# Altium PCB PCB1.PcbDoc
Units mil, origin at the board's own origin, x right, y up, seen from the top; angles counter-clockwise.
Board outline 2175 x 1060 mil, 2 copper layers (Top Layer, Bottom Layer); 53 components, 53 nets, 224 pads, 91 vias.
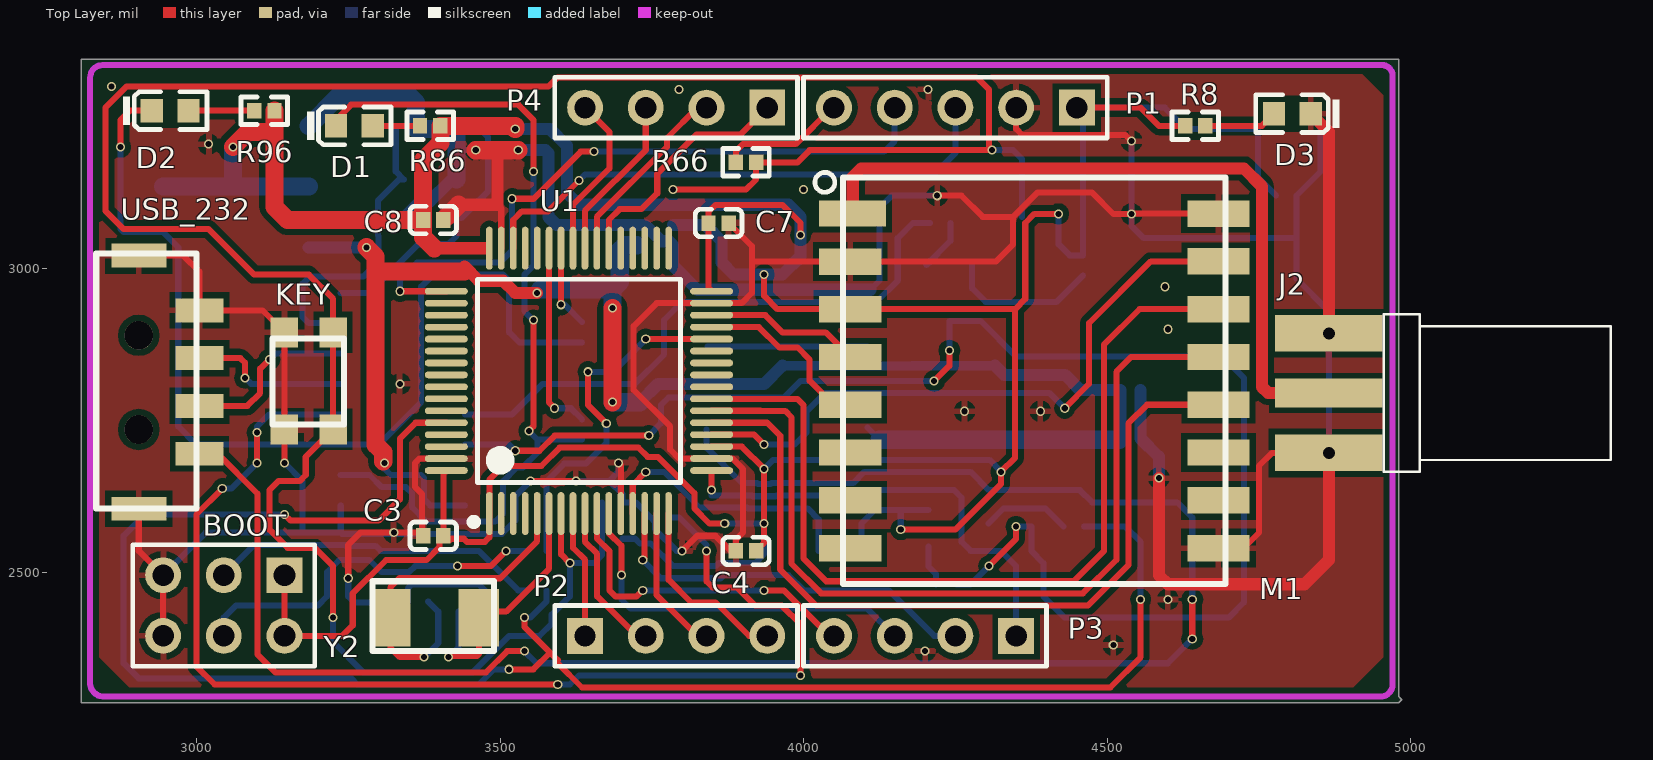
[diagram p0: Top Layer view]
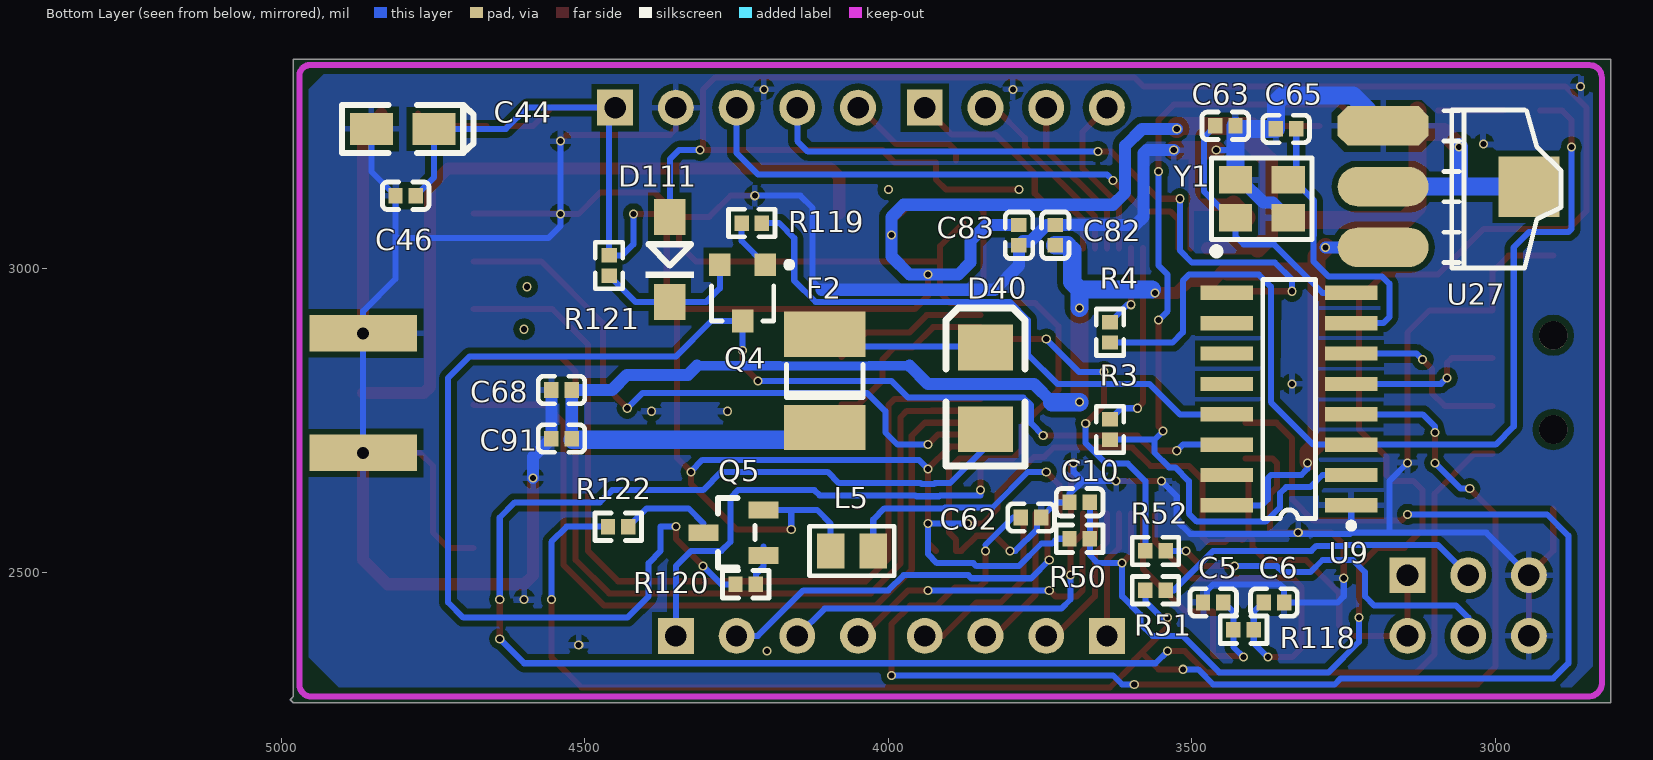
[diagram p1: Bottom Layer view, seen from below]
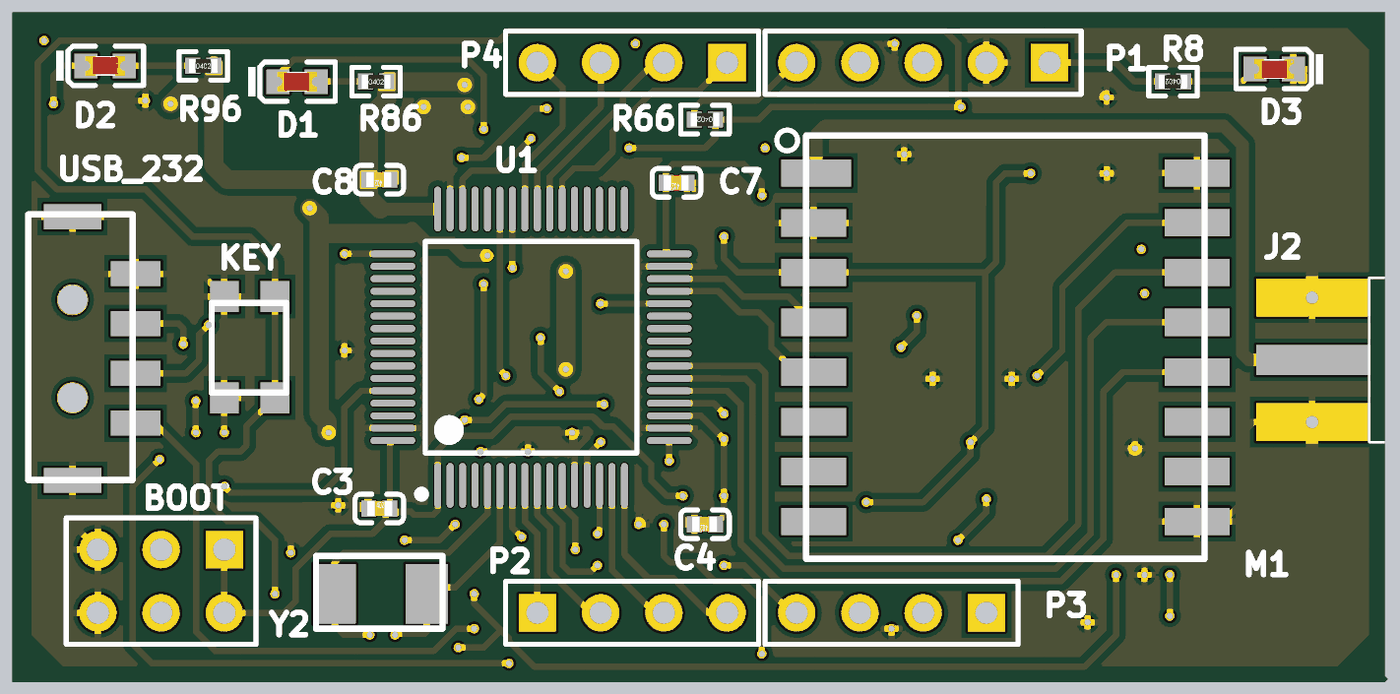
[diagram p2: 3D render of the assembled board from above, using the file's embedded part models]
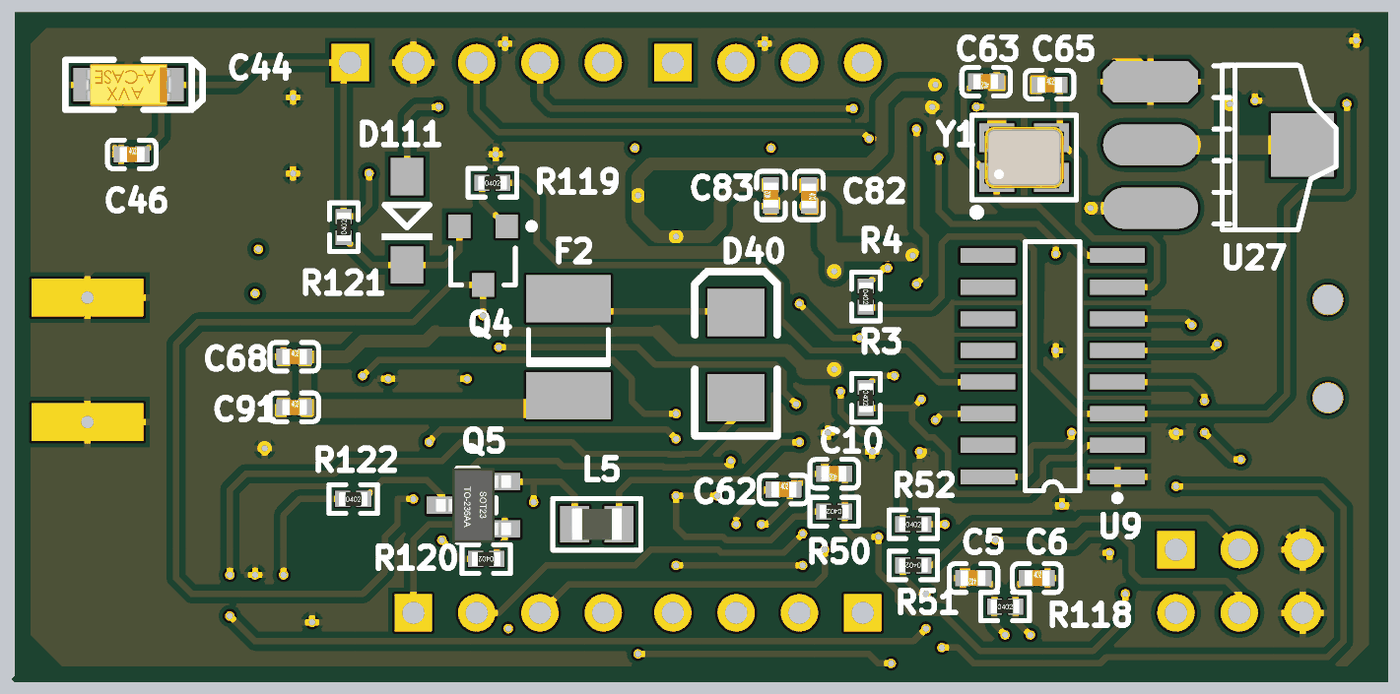
[diagram p3: 3D render of the assembled board from below, using the file's embedded part models]

## Layer stack, top to bottom
Top Layer: signal copper 1.4
Dielectric: dielectric 12.6, FR-4, Dk 4.8
Bottom Layer: signal copper 1.4

## Board outline
2810,3345 2810,2285 4980,2285 4985,2290 4980,2295 4980,3345 2810,3345

## Design rules (kind name [scope] priority, off if disabled: settings)
Clearance [All] p1: gap=10
MinimumSolderMaskSliver [All] p1: minsoldermaskwidth=3
PolygonConnect [All] p1: connectstyle=Relief reliefconductorwidth=10 reliefentries=4 polygonreliefangle="90 Angle"
RoutingVias [All] p1: holewidth=28 width=50 viastyle="Through Hole" minholewidth=28 minwidth=50 maxholewidth=28 maxwidth=50
SilkToSilkClearance [All] p1: silktosilkclearance=0
SilkscreenOverComponentPads [All] p1: minsilkscreentomaskgap=0
SolderMaskExpansion [All] p1: expansion=4
Width [All] p1: maxlimit=30 minlimit=10 preferedwidth=10
25 further rules are at their usual default settings.

## Components (designator, comment, footprint, x,y, rotation, side; value= is the part's Value field where it differs from the comment)
BOOT "Header 3X2" HDR2X3 3145,2495 r180 top
C3 "100nF (104) 10% 16V" 0402_C 3390,2560 r0 top
C4 "100nF (104) 10% 16V" 0402_C 3905,2535 r180 top
C5 "22pF (220) 5% 50V" 0402_C 3465,2450 r0 bottom
C6 "22pF (220) 5% 50V" 0402_C 3365,2450 r180 bottom
C7 "100nF (104) 10% 16V" 0402_C 3860,3075 r180 top
C8 "100nF (104) 10% 16V" 0402_C 3390,3080 r180 top
C10 "100nF (104) 10% 16V" 0402_C 3685,2615 r0 bottom
C44 "10uF (106) ±10% 16V" CASE-A_3216 4800,3230 r180 bottom
C46 "100nF (104) 10% 16V" 0402_C 4795,3120 r180 bottom
C62 "100nF (104) 10% 16V" 0402_C 3765,2590 r180 bottom
C63 "22pF (220) 5% 50V" 0402_C 3445,3235 r0 bottom
C65 "22pF (220) 5% 50V" 0402_C 3345,3230 r180 bottom
C68 "100nF (104) 10% 16V" 0402_C 4538.27,2800 r180 bottom
C82 "100nF (104) 10% 16V" 0402_C 3725,3055 r270 bottom
C83 "100nF (104) 10% 16V" 0402_C 3785,3055 r90 bottom
C91 "100nF (104) 10% 16V" 0402_C 4538.27,2720 r180 bottom
D1 "红灯 0603" 0603_LED_S1 3260,3235 r0 top
D2 "红灯 0603" 0603_LED_S1 2956.73,3260 r0 top
D3 "红灯 0603" 0603_LED_S1 4805,3255 r180 top
D40 "1N5819" LED-3528 3840,2735 r90 bottom
D111 "1N4148" DIODE_SOP 4360,3085 r270 bottom
F2 "500ma/30V" 1812 4105,2815 r90 bottom
J2 "SMA" SMA-2 4865,2795 r180 top
KEY "PWR_KEY" PCBComponent_1#1 3125,2885 r270 top
L5 "10uH" 0805_L 4060,2535 r180 bottom
M1 "Ra-01" "Ra-01 Module" 4380,2815 r0 top
P1 "Header 5" HDR1X5 4450,3265 r180 top
P2 "Header 4" HDR1X4 3640,2395 r0 top
P3 "Header 4" HDR1X4 4350,2395 r180 top
P4 "Header 4" HDR1X4 3940,3265 r180 top
Q4 "S8050" SOT-23R 4240,2965 r0 bottom
Q5 "SS8550 Y2" SOT-23(SOT-23-3) 4255,2565 r180 bottom
R3 "22Ω (22R0) ±1%" 0402_R 3635,2735 r270 bottom
R4 "22Ω (22R0) ±1%" 0402_R 3635,2895 r270 bottom
R8 "1KΩ (1001) ±1%" 0402_R 4645,3235 r180 top
R50 "10KΩ (1002) ±1%" 0402_R 3685,2555 r0 bottom
R51 "10KΩ (1002) ±1%" 0402_R 3560,2470 r0 bottom
R52 "10KΩ (1002) ±1%" 0402_R 3560,2535 r180 bottom
R66 "100Ω (1000) ±1%" 0402_R 3905,3175 r180 top
R86 "1KΩ (1001) ±1%" 0402_R 3385,3235 r0 top
R96 "1KΩ (1001) ±1%" 0402_R 3111.73,3260 r0 top
R118 "1MΩ (1004) ±1%" 0402_R 3415,2405 r180 bottom
R119 "1KΩ (1001) ±1%" 0402_R 4225,3075 r180 bottom
R120 "1KΩ (1001) ±1%" 0402_R 4235,2480 r0 bottom
R121 "10KΩ (1002) ±1%" 0402_R 4460,3005 r90 bottom
R122 "1KΩ (1001) ±1%" 0402_R 4445,2575 r180 bottom
U1 "STM32F103RCT6" LQFP-64_10x10x05P 3630,2815 r0 top
U9 "CH340G" SOP16M 3340,2785 r90 bottom
U27 "AMS1117-3.3" AMS1117 3185,3235 r270 bottom
USB_232 "USB" PCBComponent_1#2 3005,2655 r90 top
Y1 "12MHz" LC-SMD-3225_4P 3385,3115 r180 bottom
Y2 "8MHz" PCBComponent_1#3 3465,2425 r180 top

## Footprints (in the part's own frame and the unit in brackets; to place one, negate y for a bottom-side part, rotate by r counter-clockwise, add the part's x,y. Pads: shape width x height; smd on the part's side, far side on the other; paste and mask are expansions set on the pad)
0402_C [mm]
  rect 0.6x0.65 smd mask+0.051: 1(-0.425,0) 2(0.425,0)
  silkscreen extent -0.97,-0.58 0.97,0.58, body extent -0.48,-0.3 0.52,0.3, height 0.2
0402_R [mm]
  rect 0.6x0.65 smd mask+0.051: 1(-0.425,0) 2(0.425,0)
  silkscreen extent -0.97,-0.58 0.97,0.58, body extent -0.57,-0.27 0.58,0.28, height 0.41
0603_LED_S1 [mm]
  rect 0.93x0.98 smd: A(0.77,0) K(-0.77,0)
  silkscreen extent -1.97,-0.79 1.54,0.79, body extent -0.8,-0.4 0.8,0.4, height 0.6
0805_L [mm]
  rect 1.16x1.47 smd: 1(-0.89,0) 2(0.89,0)
  silkscreen extent -1.77,-1.04 1.77,1.03, body extent -1,-0.64 1,0.64, height 0.6
1812 [mm] "Chip Capacitor; Body 4.5 x 3.2 mm (LxW typ)"
  rect 1.9x3.4 smd: 1(-1.95,0) 2(1.95,0)
  silkscreen extent -0.7,-1.6 0.7,1.6
AMS1117 [mil]
  oct 65x150 smd: 1(0.03,-0.06)
  oval 65x150 smd: 2(100.03,-0.06) 3(200.03,-0.06)
  rect 100x100 smd: 4(100.03,239.94)
  silkscreen extent -26,100 234,293
CASE-A_3216 [mm]
  rect 1.8x1.35 smd: 1(1.31,0) 2(-1.31,0)
  silkscreen extent -2.54,-1 2.97,1, body extent -1.7,-0.84 1.7,0.84, height 1.71
DIODE_SOP [mm]
  rect 1.5x1.3 smd: 1(0,0) 2(3.556,0)
  silkscreen extent 1.14,-1.02 2.56,1.02
HDR1X4 [mm]
  rect 1.5x1.5 hole 0.889: 1(0,0)
  round 1.5 hole 0.889: 2(2.54,0) 3(5.08,0) 4(7.62,0)
  silkscreen extent -1.27,-1.27 8.89,1.27
HDR1X5 [mm] "Connector; Header; 5 Position"
  rect 1.5x1.5 hole 0.9: 1(0,0)
  round 1.5 hole 0.9: 2(2.54,0) 3(5.08,0) 4(7.62,0) 5(10.16,0)
  silkscreen extent -1.27,-1.27 11.43,1.27
HDR2X3 [mm]
  rect 1.5x1.5 hole 0.9: 1(0,0)
  round 1.5 hole 0.9: 2(0,2.54) 3(2.54,0) 4(2.54,2.54) 5(5.08,0) 6(5.08,2.54)
  silkscreen extent -1.27,-1.27 6.35,3.81
LC-SMD-3225_4P [mm]
  rect 1.4x1.15 smd: 1(-1.1,-0.8) 2(1.1,-0.8) 3(1.1,0.8) 4(-1.1,0.8)
  silkscreen extent -2.1,-2.35 2.1,1.7, body extent -1.6,-1.25 1.6,1.25, height 0.61
LED-3528 [mil]
  rect 75x90 smd: 1(-0.02,0.13) 2(134.98,0.13)
  silkscreen extent -60,-65 200,65
LQFP-64_10x10x05P [mm]
  oval 0.28x1.8 smd mask+0.051: 1(-3.75,-5.55) 2(-3.25,-5.55) 3(-2.75,-5.55) 4(-2.25,-5.55) 5(-1.75,-5.55) 6(-1.25,-5.55) 7(-0.75,-5.55) 8(-0.25,-5.55) 9(0.25,-5.55) 10(0.75,-5.55) 11(1.25,-5.55) 12(1.75,-5.55) 13(2.25,-5.55) 14(2.75,-5.55) 15(3.25,-5.55) 16(3.75,-5.55) 33(3.75,5.55) 34(3.25,5.55) 35(2.75,5.55) 36(2.25,5.55) 37(1.75,5.55) 38(1.25,5.55) 39(0.75,5.55) 40(0.25,5.55) 41(-0.25,5.55) 42(-0.75,5.55) 43(-1.25,5.55) 44(-1.75,5.55) 45(-2.25,5.55) 46(-2.75,5.55) 47(-3.25,5.55) 48(-3.75,5.55)
  oval 1.8x0.28 smd mask+0.051: 17(5.55,-3.75) 18(5.55,-3.25) 19(5.55,-2.75) 20(5.55,-2.25) 21(5.55,-1.75) 22(5.55,-1.25) 23(5.55,-0.75) 24(5.55,-0.25) 25(5.55,0.25) 26(5.55,0.75) 27(5.55,1.25) 28(5.55,1.75) 29(5.55,2.25) 30(5.55,2.75) 31(5.55,3.25) 32(5.55,3.75) 49(-5.55,3.75) 50(-5.55,3.25) 51(-5.55,2.75) 52(-5.55,2.25) 53(-5.55,1.75) 54(-5.55,1.25) 55(-5.55,0.75) 56(-5.55,0.25) 57(-5.55,-0.25) 58(-5.55,-0.75) 59(-5.55,-1.25) 60(-5.55,-1.75) 61(-5.55,-2.25) 62(-5.55,-2.75) 63(-5.55,-3.25) 64(-5.55,-3.75)
  silkscreen extent -4.55,-6.05 4.25,4.25
PCBComponent_1#1 [mm]
  rect 1.25x1.15 smd: 1(-0.254,2.54) 2(-0.254,0.508) 3(3.81,2.54) 4(3.81,0.508)
  silkscreen extent 0,0 3.6,3
PCBComponent_1#2 [mm]
  rect 1x2 smd: 1(1.016,0) 2(3.016,0) 3(5.016,0) 5(7.016,0)
  rect 1x2.3 smd: 9(-1.284,2.54) 10(9.308,2.54)
  round 1.2 hole 1.2: 11(2.032,2.54) 12(5.969,2.54)
  silkscreen extent -1.27,0.13 9.4,4.32
PCBComponent_1#3 [mm]
  rect 1.7x2.4 smd: 1(0,0) 2(3.7,0)
  silkscreen extent -0.64,-1.52 4.44,1.4
"Ra-01 Module" [mm]
  rect 2.8x1.1 smd: 1(-7.6,7.002)
  rect 2.6x1.1 smd: 2(-7.7,4.99) 3(-7.7,3.002) 4(-7.7,1.002) 5(-7.7,-0.998) 6(-7.7,-2.998) 7(-7.7,-4.998) 8(-7.7,-6.998) 9(7.7,-6.998) 10(7.7,-4.998) 11(7.7,-2.998) 12(7.7,-0.998) 13(7.7,1.002) 14(7.7,3.002) 15(7.7,5.002) 16(7.7,6.996)
  silkscreen extent -9.18,-8.5 8,8.72
SMA-2 [mm]
  rect 4.5x1.2 smd: 1(0,0)
  rect 4.5x1.524 hole 0.5: 2(0,2.5) 2(0,-2.5)
  silkscreen extent -11.8,-3.3 -2.3,3.3
SOP16M [mm]
  rect 0.6x2.2 smd: 1(-4.445,-2.6) 2(-3.175,-2.6) 3(-1.905,-2.6) 4(-0.635,-2.6) 5(0.635,-2.6) 6(1.905,-2.6) 7(3.175,-2.6) 8(4.445,-2.6) 9(4.445,2.6) 10(3.175,2.6) 11(1.905,2.6) 12(0.635,2.6) 13(-0.635,2.6) 14(-1.905,2.6) 15(-3.175,2.6) 16(-4.445,2.6)
  silkscreen extent -5.42,-2.72 5,1.1
SOT-23(SOT-23-3) [mm]
  rect 1.25x0.7 smd: 1(1.25,-0.95) 2(1.25,0.95) 3(-1.25,0)
  silkscreen extent -0.65,-1.46 0.9,1.46, body extent -1.5,-1.5 1.5,1.5, height 1.3
SOT-23R [mm]
  rect 0.9x0.95 smd: 1(0.95,-1.048) 2(-0.95,-1.048) 3(0,1.302)
  silkscreen extent -2.07,-1.17 1.3,1.3

## Part data
BOOT: "Header, 3-Pin, Dual row"
C3 C4 C7 C8 C10 C46 C62 C68 C82 C83 C91: library part "0402 100nF (104) 10% 16V", "贴片电容"
C5 C6 C63 C65: library part "0402 22pF (220) 5% 50V", "贴片电容"
C44: library part "3216 10uF (106) 10% 16V", "钽电容"
D1 D2 D3: library part "0603 红灯", "发光二极管"
D40: library part "Diode 1N4001", "1 Amp General Purpose Rectifier"
D111: library part D
F2: library part FUSE2, "Fuse"
J2: library part SMA-2, "SMA-2"
KEY: library part KEY_M
L5: library part INDUCTOR1
M1: library part "Ra-01 Module"
P1: "Header, 5-Pin"
P2 P3 P4: "Header, 4-Pin"
Q4: library part QNPN, "NPN Bipolar Transistor"
Q5: library part "SOT-23 SS8550 Y2", "三极管"
R3 R4: library part "0402 22Ω (22R0) 1%", "贴片电阻"
R8 R86 R96 R119 R120 R122: library part "0402 1KΩ (1001) 1%", "贴片电阻"
R50 R51 R52 R121: library part "0402 10KΩ (1002) 1%", "贴片电阻"
R66: library part "0402 100Ω (1000) 1%", "贴片电阻"
R118: library part "0402 1MΩ (1004) 1%", "贴片电阻"
U1: library part STM32F103RDT6
U9: "USB2UART"
U27: library part AMS1117
USB_232: library part USB5
Y1: library part Component_1
Y2: library part XTAL, "Crystal Oscillator"

## Via types
v1: diameter 15, hole 10, Top Layer to Bottom Layer, 91 vias

## Nets (pads, with @x,y where several pads share a name; then routed paths per layer and width w, separated by ;. In a path a pad name is that pad's centre, name@x,y a point inside that pad or via, vN(x,y) a via of type N, cw(c..) or ccw(c..) an arc to the next point about the centre after c; other vN are vias at no path point)
3.3V: BOOT.1 BOOT.2 C3.2 C4.1 C7.2 C8.2 C44.1 C46.2 C83.2 L5.1 M1.3 P1.1 Q5.2 R8.2 R50.2 R86.2 R96.2 R121.2 U1.1 U1.19 U1.32 U1.48 U1.64 U27.2 U27.4 | length 7054.8
  Top Layer w10: BOOT.1@3165,2475 BOOT.1 BOOT.2 3240,2395 3257.41,2412.41 3257.41,2465 3312.41,2520 3379.09,2520 3400.08,2540.99 3400.08,2553.35 C3.2 ; U1.64@3411.5,2666.54 3406.73,2661.77 3406.73,2563.27 3417.32,2552.68 3419.64,2555 3440.36,2555 3445.36,2550 3475,2550 3482.36,2557.36 U1.1 3482.36,2652.4 3505,2675.04 3514.61,2675.04 3514.64,2675 3568.28,2675 3598.28,2705 3728.06,2705 3743.06,2690 3760,2690 3820,2630 3820,2605 3845,2580 v1(3870,2580) ; U1.19 3898.27,2706.73 v1(3935,2670) v1(3935,2580) 3935,2548.27 C4.1 ; U1.32@3848.5,2963.46 3843.27,2968.7 C7.2 3843.27,3093.27 3855,3105 3965,3105 3995,3075 v1(3995,3055) ; v1(3935,2990) 3935,2955 3956.8,2933.2 M1.3 4348.2,2933.2 ; v1(4160,2570) 4250,2570 4325,2645 v1(4325,2665) 4348.2,2688.2 4348.2,2933.2 ; v1(4420,3090) 4380,3090 4365,3075 4365,2950 4348.2,2933.2 ; P1.1 4555,3265 4585,3235 R8.2
  Top Layer w20: 3391.5,3033.5 3475,3033.5
  Top Layer w30: v1(3060,3200) 3085,3225 3128.46,3225 ; R96.2 3128.46,3225 ; 3391.5,3033.5 3373.27,3051.73 C8.2 ; v1@3520,3235 R86.2 3401.73,3206.73 3373.27,3178.27 C8.2 ; v1(3525,3230) v1@3525,3235 ; 3128.46,3225 3128.46,3101.54 3150,3080 C8.2
  Bottom Layer w10: R50.2 3722.45,2555 3730.24,2547.2 3747.8,2547.2 3785,2510 3855,2510 3860,2515 3920,2515 3935,2530 v1(3935,2580) v1(3870,2580) ; v1(3935,2670) 3950,2685 4306.18,2685 v1@4325,2666.18 ; L5.1 4095.04,2580 4117.44,2602.4 Q5.2 ; v1(4160,2570) 4160,2600 ; v1(4420,3090) 4420,3040 4438.27,3021.73 R121.2 P1.1@4460,3255 ; P1.1 4595,3265 4630,3230 C44.1 4748.43,3149.84 C46.2
  Bottom Layer w20: v1(3525,3230) 3582.43,3230 3610,3202.43 3610,3125 3630,3105 3975,3105 3995,3085 v1(3995,3055) 3995,3020 3965,2990 v1(3935,2990) 3885,2990 3865,3010 3865,3045 3838.27,3071.73 C83.2
  Bottom Layer w30: U27.4 3060,3134.97 ; v1(3060,3200) 3060,3134.97 ; U27.2 3060,3134.97
BOOT0: R51.2 R122.1 U1.60 | length 3073.7
  Top Layer w10: v1(3145,2595) 3155,2585 3300,2585 3335,2620 3335,2720 3361.1,2746.1 U1.60 ; v1(3515,2340) 3555,2340 3582.3,2367.3 ; v1(3540,2425) 3540,2410 3595,2355 ; 3595,2350 3635,2310 4505,2310 4555,2360 v1(4555,2455)
  Bottom Layer w10: v1(3145,2595) 2915,2595 2880,2560 2880,2350 2905,2325 3255,2325 3265,2315 3465,2315 3490,2340 v1(3515,2340) ; v1(3540,2425) 3550,2425 3576.73,2451.73 R51.2 ; R122.1 4530,2575 4555,2550 v1(4555,2455)
BOOT1: R52.1 U1.28 | length 594.9
  Top Layer w10: v1(3645,2830) 3645,2775 v1(3675,2745) ; v1(3740,2883.9) U1.28
  Bottom Layer w10: R52.1 3576.73,2650 3605.46,2678.72 3641.28,2678.72 3675,2712.45 v1(3675,2745) ; v1(3645,2830) 3686.1,2830 v1(3740,2883.9)
CE: M1.4 U1.30 | length 256.8
  Top Layer w10: U1.30 3936.73,2923.27 3965,2895 4036.31,2895 M1.4
"CH340 D+": U9.5 USB_232.3 | length 264.9
  Top Layer w10: USB_232.3 3072.48,2852.48 3080,2844.96 v1(3080,2820)
  Bottom Layer w10: v1(3080,2820) 3090,2810 U9.5
"CH340 D-": U9.6 USB_232.2 | length 291.8
  Top Layer w10: USB_232.2 3083.74,2773.74 3105,2795 3105,2835 v1(3120,2850)
  Bottom Layer w10: v1(3120,2850) 3130,2860 U9.6
CSN: M1.15 U1.20 | length 1066.3
  Top Layer w10: U1.20 3918.58,2726.42 v1(3935,2710) ; v1(4430,2770) 4470,2810 4470,2910 4571.94,3011.94 M1.15
  Bottom Layer w10: v1(3935,2710) 3985,2710 4005,2730 4005,2765 4035,2795 4405,2795 v1(4430,2770)
GND: BOOT.5 BOOT.6 C3.1 C4.2 C5.2 C6.2 C7.1 C8.1 C10.2 C44.2 C46.1 C62.2 C63.1 C65.1 C68.1 C82.1 C83.1 C91.1 D3.K J2.2 KEY.2 KEY.4 M1.2 M1.9 M1.16 P1.2 U1.12 U1.18 U1.31 U1.47 U1.63 U9.1 U27.1 USB_232.5 USB_232.9 USB_232.10 Y1.2 Y1.4 | length 9269.1
  Top Layer w10: USB_232.9 2905,2535 BOOT.5 BOOT.6 ; USB_232.10 2978.54,3021.46 3005,2995 USB_232.5 3108.78,2931.22 KEY.2 KEY.4 v1(3145,2680) ; v1(3250,2490) 3250,2545 3270,2565 v1(3325,2565) C3.1@3368.27,2565 ; C3.1@3371.63,2568.27 3371.63,2628.37 3360,2640 3360,2680 3367.05,2687.05 U1.63 ; C8.1 C8.1@3410.67,3083.94 ; 3496.06,3105 3502.05,3099.02 U1.47 ; v1(3550,2650) v1(3625,2650) ; U1.12 v1@3698.9,2676.1 ; v1(3800,2535) 3825,2560 3854.64,2560 3879.64,2535 C4.2 3888.27,2553.27 3900,2565 3900,2670 3882.95,2687.05 U1.18 3795,2687.05 3780,2702.05 3780,2740 3720,2800 3720,2905 3757.95,2942.95 U1.31 3897.95,2942.95 3915,2960 3915,3036.73 C7.1 ; 3916.44,3011.44 M1.2 4316.44,3011.44 4345,3040 4345,3085 ; v1(4220,3120) 4260,3120 4295,3085 4345,3085 ; P1.2 4350,3230 4360,3220 4530,3220 v1(4540,3210) ; v1(4540.16,3089.84) 4510.16,3089.84 4475,3125 4385,3125 4345,3085 ; v1@4540.16,3090.44 M1.16 ; M1.9 4724.5,2539.5 4750,2565 4750,2675 4771.57,2696.57 J2.2@4865,2696.57
  Top Layer w20: 3431.73,3105 3496.06,3105 3496.06,3195 ; v1(4585,2655) 4585,2495 4600,2480 4825,2480 4865,2520 J2.2@4865,2696.57 ; D3.K 4865,3225.31 J2.2@4865,2893.43
  Top Layer w30: C8.1@3410.67,3083.94 3431.73,3105 ; v1(3460,3195) 3496.06,3195 v1(3530,3195)
  Bottom Layer w10: BOOT.5 3015,2565 3175,2565 ; v1(3145,2680) 3175,2650 3175,2565 ; U9.1 3237.64,2565 3175,2565 ; 3239.45,2563.19 3503.19,2563.19 3525,2585 3525,2625 v1(3550,2650) ; v1(3250,2490) 3250,2460 3260,2450 C6.2 3348.27,2473.27 3355,2480 3465,2480 3475.08,2469.92 3475.08,2456.65 C5.2 ; Y1.4@3419.89,3146.5 Y1.4 ; C63.1@3423.27,3230 C63.1 ; 3428.27,3195 v1(3460,3195) ; v1(3625,2650) 3680,2650 ; v1(3695,2680) 3695,2665 3680,2650 ; v1(3800,2535) 3790.91,2535 3754.92,2570.99 3754.92,2583.35 C62.2 3723.27,2615 C10.2 3701.73,2628.27 3680,2650 ; 4110,2965 4125,2980 4125,3100 4145,3120 v1(4220,3120) ; v1@4540,3090 v1(4540,3210) ; v1(4540.16,3089.84) 4540.16,3069.84 4560,3050 4811.73,3050 ; C44.2 4851.57,3159.84 C46.1 4811.73,3050 ; J2.2@4865,2696.57 4865,2893.43 4865,2930 4811.73,2983.27 4811.73,3050
  Bottom Layer w20: Y1.2 3367.05,3108.86 3382.25,3108.86 Y1.4@3419.89,3146.5 ; v1(3530,3195) 3575,3195 3580,3190 3580,3085 3593.27,3071.73 C82.1 3739.18,3071.73 3765.99,3044.92 3778.35,3044.92 C83.1 3785,3005 3825,2965 4110,2965 ; C68.1 C91.1 4585,2690 v1(4585,2655)
  Bottom Layer w30: U27.1 3235.1,3285 3350,3285 3361.73,3273.27 C65.1 C63.1@3423.27,3230 ; Y1.4 3428.27,3195 C63.1
  other v1: 4200,2370 4510,2380 4600,2455 4265,2765 4390,2765 3335,2810 3020,3205 3795,3295 4205,3295 2860,3300
IRO: M1.5 U1.29 | length 301.8
  Top Layer w10: U1.29 3926.42,2903.58 3960,2870 3990,2870 4010,2850 4010,2815 4049.28,2775.72 M1.5
LCD92: P2.1 U1.8 | length 209.7
  Top Layer w10: U1.8 3620.16,2540.16 3640,2520.32 P2.1
LCD93: P2.2 U1.9 | length 251.8
  Top Layer w10: U1.9 3639.84,2550.16 3660,2530 3660,2460 3725,2395 P2.2
LCD96: P2.3 U1.15 | length 244.3
  Top Layer w10: U1.15 3757.95,2462.05 3825,2395 P2.3
LCD97: P2.4 U1.16 | length 309.8
  Top Layer w10: U1.16 3777.64,2487.36 3815,2450 3855,2450 3910,2395 P2.4
LCD98: P3.1 U1.17 | length 756.5
  Top Layer w10: v1(3848.5,2635) U1.17
  Bottom Layer w10: v1(3848.5,2635) 3848.5,2626.5 3914.86,2626.5 3916.36,2625 3953.64,2625 3955.14,2626.5 4113.25,2626.5 4121.76,2635 4247.79,2635 4260,2622.79 4260,2550 4275,2535 4325,2535 4350,2510 P3.1
LCD99: P3.2 U1.14 | length 648.8
  Top Layer w10: v1(3735,2520) 3738.27,2523.27 U1.14
  Bottom Layer w10: v1(3735,2520) 3765,2490 3863.28,2490 3868.28,2495 3975,2495 4000,2470 4140,2470 4215,2395 P3.2
LCD100: P3.3 U1.11 | length 625
  Top Layer w10: U1.11 3679.21,2564.32 3700,2543.54 v1(3700,2495)
  Bottom Layer w10: v1(3700,2495) 3700,2455 3715,2440 4105,2440 P3.3
LCD101: P3.4 U1.10 | length 544.3
  Top Layer w10: U1.10 3659.53,2555.47 3680,2535 3680,2470 3690,2460 3725,2460 v1(3735,2470) ; v1(3935,2470) 3967.45,2470 4042.45,2395 P3.4
  Bottom Layer w10: v1(3735,2470) v1(3935,2470)
LCD102: P4.1 U1.38 | length 402.8
  Top Layer w10: U1.38 3679.21,3080 3697.11,3097.89 3732.89,3097.89 3758.91,3123.91 3758.91,3156.09 3823.28,3220.47 3895.47,3220.47 P4.1
LCD103: P4.2 U1.39 | length 315
  Top Layer w10: U1.39 3659.53,3085 3775,3200.47 3775,3215 3825,3265 P4.2
LCD104: P4.3 U1.40 | length 273
  Top Layer w10: U1.40 3639.84,3095 3740,3195.16 P4.3
LCD105: P4.4 U1.41 | length 272.9
  Top Layer w10: U1.41 3620.16,3105 3680,3164.84 3680,3225 P4.4
MCU_NRST: C10.1 D111.1 KEY.1 KEY.3 R50.1 R66.1 U1.7 | length 4362.2
  Top Layer w10: v1(3225,2425) 3225,2510 3195,2540 3150,2540 3120.47,2569.53 3120.47,2635.47 3135,2650 3170,2650 3180,2660 3180,2690 KEY.3 KEY.1 3225,2950 3185,2990 3095,2990 3020,3065 2880,3065 2850,3095 2850,3265 2885,3300 3580,3300 3595,3315 4285,3315 4305.47,3294.53 v1@4305.47,3199.53 ; U1.7 3600.47,2529.53 v1(3615,2515) ; v1(3785,3130) 3905,3130 3921.73,3146.73 R66.1 3990,3175 4010,3195 v1(4310,3195)
  Bottom Layer w10: v1(3225,2425) 3225,2385 3275,2335 3455,2335 3515,2395 3565,2395 3585,2415 3585,2430 3615,2460 v1(3615,2515) 3655,2515 3668.27,2528.27 R50.1 C10.1 ; v1(4310,3195) 4345,3195 4360,3180 D111.1
MCU_SWCLK: P1.4 U1.49 | length 1109.9
  Top Layer w10: v1(3335,2962.64) U1.49 ; v1(3520,3115) 3555.36,3115 3632.86,3192.5 v1(3655,3192.5)
  Bottom Layer w10: v1(3335,2962.64) 3335,2981.72 3363.28,3010 3500,3010 3520,3030 v1(3520,3115) ; v1(3655,3192.5) 4132.5,3192.5 4150,3210 P1.4
MCU_SWDIO: P1.3 U1.46 | length 895.3
  Top Layer w10: U1.46 3521.73,3080 3535.87,3094.13 3579.13,3094.13 v1(3630,3145)
  Bottom Layer w10: v1(3630,3145) 3640,3155 4215,3155 4250,3190 P1.3
MISO: M1.13 U1.22 | length 1443.6
  Top Layer w10: U1.22 3929.21,2765.79 3929.53,2765.47 ; 3929.21,2765.47 3929.53,2765.47 ; M1.13 4539.46,2854.46 4515,2830 4515,2520 4460,2465 4029.01,2465 3980,2514.01 3980,2755 3969.53,2765.47 3929.53,2765.47
MOSI: M1.14 U1.23 | length 1492
  Top Layer w10: U1.23 3989.53,2785.47 4000,2775 4000,2522.3 4037.3,2485 4445,2485 4495,2535 4495,2875 4553.2,2933.2 M1.14
NetBOOT_3: BOOT.3 R51.1 | length 550
  Bottom Layer w10: BOOT.3 3095,2545 3244.64,2545 3246.46,2543.19 3295,2543.19 3303.19,2535 3465,2535 3530,2470 R51.1
NetBOOT_4: BOOT.4 R52.2 | length 611.5
  Top Layer w10: v1(3430,2510) 3485,2510 v1(3510,2535)
  Bottom Layer w10: BOOT.4 3045,2425 3065,2445 3200,2445 3215,2460 3215,2500 3235,2520 3274.45,2520 ; 3276.8,2520 3285,2520 3305,2500 3350,2500 3360,2510 v1(3430,2510) ; v1(3510,2535) R52.2
NetC62_1: C62.1 U9.4 | length 2000.2
  Top Layer w10: v1(3042.5,2637.5) 3000,2595 3000,2345 3030,2315 v1(3595,2315) ; v1(3100,2680) v1(3100,2730) ; v1(3840,2535) 3840,2485 3850,2475 3890,2475 3920,2445 3964.16,2445 3995,2414.16 v1(3995,2330)
  Bottom Layer w10: v1(3042.5,2637.5) 3057.5,2637.5 v1(3100,2680) ; v1(3100,2730) 3100,2740 3120,2760 U9.4 ; v1(3595,2315) 3615,2315 3630,2330 v1(3995,2330) ; C62.1 3795,2590 3840,2545
NetC63_2: C63.2 U9.8 Y1.1 | length 444.9
  Bottom Layer w10: U9.8 3285,2960 3365,3040 3415,3040 3428.31,3053.31 Y1.1 3436.72,3083.5 3480,3126.78 3480,3216.73 C63.2
NetC65_2: C65.2 U9.7 Y1.3 | length 508.7
  Bottom Layer w10: U9.7 3185,2910 3175,2920 3175,2975 3186.81,2986.81 3275,2986.81 3300,3011.81 3300,3053.79 3299.13,3054.65 3299.13,3112.35 3333.27,3146.5 Y1.3 3328.27,3159.92 C65.2
NetD1_A: D1.A R86.1 | length 78
  Top Layer w10: D1.A R86.1
NetD2_A: D2.A R96.1 | length 108
  Top Layer w10: D2.A R96.1
NetD3_A: D3.A R8.1 | length 121.2
  Top Layer w10: R8.1 4754.68,3235 D3.A
NetD40_2: D40.2 F2.2 | length 263.1
  Bottom Layer w10: D40.2@3841.92,2871.77 F2.2@4105,2871.77
NetD111_2: D111.2 Q4.1 R121.1 | length 248.5
  Bottom Layer w10: Q4.1 4277.4,2967.6 4300,2945 D111.2 4416.73,2945 R121.1
NetJ2_1: J2.1 M1.1 | length 1196.8
  Top Layer w20: M1.1 4080.79,3150.79 4095,3165 4130.11,3165 4725,3165 4755,3135 4755,2805 4765,2795 J2.1
NetL5_2: L5.2 U1.13 | length 446.4
  Top Layer w10: U1.13 3718.58,2643.58 v1(3740,2665)
  Bottom Layer w10: v1(3740,2665) 3770,2665 3828.5,2606.5 3906.58,2606.5 3908.08,2605 4006.5,2605 4024.96,2586.54 L5.2
NetP1_5: P1.5 R66.2 | length 206.4
  Top Layer w10: R66.2@3888.27,3178.27 3888.27,3193.27 3900,3205 3986.72,3205 4046.72,3265 P1.5
NetQ4_2: Q4.2 R119.1 | length 85
  Bottom Layer w10: Q4.2 4241.73,3045.39 R119.1
NetQ4_3: Q4.3 R120.2 U9.14 | length 2497.4
  Top Layer w10: v1(3525,2700) 3565,2700 3590,2725 v1(3745,2725) ; v1(4215,2815) 4240,2840 v1(4240,2865) ; v1(4305,2510) 4350,2555 v1(4350,2575)
  Bottom Layer w10: U9.14 3515,2710 v1(3525,2700) ; v1(3745,2725) 3765,2745 3765,2775 3777.48,2787.48 3967.48,2787.48 3995,2815 v1(4215,2815) ; v1(4240,2865) Q4.3 4291.26,2913.74 4350,2855 4690,2855 4725,2820 4725,2450 4700,2425 4430,2425 4395,2460 4395,2515 4375,2535 4375,2575 v1(4350,2575) ; R120.2 4275,2480 v1(4305,2510)
NetQ5_1: Q5.1 R120.1 | length 67.8
  Bottom Layer w10: 4205.79,2542.6 4205.79,2509.21 4218.27,2496.73 R120.1
NetQ5_3: Q5.3 R122.2 | length 146.8
  Bottom Layer w10: 4304.21,2580 4329.21,2605 4398.27,2605 R122.2
NetR3_1: R3.1 U1.43 | length 319.9
  Top Layer w10: U1.43 3580.79,2779.21 v1(3590,2770)
  Bottom Layer w10: v1(3590,2770) 3616.73,2770 R3.1
NetR4_1: R4.1 U1.42 | length 139.5
  Top Layer w10: v1(3600.47,2940.47) U1.42
  Bottom Layer w10: v1(3600.47,2940.47) 3606.26,2940.47 R4.1
NetR119_2: R119.2 U9.13 | length 970.6
  Bottom Layer w10: U9.13 3520,2760 3570,2810 3721.72,2810 3770,2858.28 3770,2915 3800,2945 4120,2945 4155,2980 4155,3050 4180,3075 R119.2
OSCIN: C6.1 R118.2 U1.5 Y2.2 | length 588.2
  Top Layer w10: v1(3375,2360) 3335,2360 3319.33,2375.67 Y2.2 3319.33,2475 3334.33,2490 3500,2490 3561.1,2551.1 U1.5
  Bottom Layer w10: v1(3375,2360) 3398.27,2383.27 3398.27,2435 C6.1@3381.73,2451.54
OSCOUT: C5.1 R118.1 U1.6 Y2.1 | length 462.5
  Top Layer w10: v1@3415,2361.73 3461.73,2361.73 3465,2365 Y2.1 3465,2435 3510,2435 3580.79,2505.79 U1.6
  Bottom Layer w10: v1(3415,2360) 3431.73,2376.73 R118.1 3431.73,2435 C5.1@3448.27,2451.54
RXD: D2.K R4.2 U9.3 | length 1640.8
  Top Layer w10: v1(2875,3200) 2875,3245 2890,3260 D2.K
  Bottom Layer w10: v1(2875,3200) 2875,3065 2880,3060 2945,3060 2970,3035 2970,2740 3000,2710 U9.3 3300,2710 3370,2780 3370,2970 3390,2990 3505,2990 3515,2980 3515,2895 3531.73,2878.27 R4.2
SCK: M1.12 U1.21 | length 1362.1
  Top Layer w10: U1.21 3940,2746.1 3961.44,2724.66 3961.44,2504.29 4020.73,2445 4468.28,2445 4535,2511.72 4535,2745 4565.72,2775.72 M1.12
TXD: D1.K R3.2 U9.2 | length 1446.8
  Top Layer w10: D1.K 3229.69,3244.69 3255,3270 3530,3270 3555,3245 v1(3555,3160) ; v1(3547.5,2732.5) 3555,2740 v1(3555,2915)
  Bottom Layer w10: U9.2 3285,2660 3305,2640 3345,2640 3355,2630 3355,2606.72 3378.53,2583.19 3491.88,2583.19 3505,2596.31 3505,2650 3527.5,2672.5 3537.5,2672.5 3561.73,2696.73 3561.73,2718.27 ; v1(3547.5,2732.5) 3561.73,2718.27 ; v1(3555,2915) 3540,2930 3540,2990 3555,3005 v1(3555,3160) ; R3.2 3561.73,2718.27
V5V: C68.2 C82.2 C91.2 F2.1 U9.16 U27.3 | length 2716.8
  Top Layer w20: 3441.5,3003.5 3465,2980 3505,2980 3525,2960 v1(3560.79,2960)
  Top Layer w30: v1(3279.97,3034.97) 3295,3019.94 3295,2995 ; v1@3307.5,2682.5 3307.5,2697.5 3295,2710 3295,2995 ; 3441.5,2995 3295,2995 ; v1(3685,2780) v1(3685,2935)
  Bottom Layer w10: v1(3310,2680) 3310,2670 3320,2660 3370,2660 3375,2655 3375,2620 3385,2610 U9.16 ; 4031.23,2840 4031.86,2839.37 ; F2.1 F2.1@4125,2718.23 ; 4178.14,2839.37 4178.77,2840
  Bottom Layer w15: 3965,2840 4031.23,2840 ; 4031.86,2839.37 4178.14,2839.37 ; 4178.77,2840 4315,2840
  Bottom Layer w20: U27.3 v1(3279.97,3034.97) ; 3730,2780 3760,2810 3935,2810 3965,2840 ; 4315,2840 4330,2825 4430.36,2825 4455.36,2800 C68.2 C91.2
  Bottom Layer w30: 3566.26,2965.47 3685,2965.47 ; v1(3685,2780) 3730,2780 ; v1(3685,2935) 3685,2965.47 ; C82.2 3705.47,3038.27 3697.2,3030 3697.2,2977.68 3685,2965.47 ; F2.1@4125,2718.23 C91.2@4519.76,2718.23
VUSB: D40.1 USB_232.1 | length 3072.8
  Top Layer w10: USB_232.1 3035,2695 3100.47,2629.53 3100.47,2364.53 3130,2335 3476.92,2335 3511.92,2370 v1(3540,2370) ; v1(4640,2390) v1(4640,2455)
  Bottom Layer w10: v1(3540,2370) 3560,2350 4600,2350 v1(4640,2390) ; D40.1 3840.13,2704.87 3898.5,2646.5 3923.15,2646.5 3924.64,2645 3945.36,2645 3946.85,2646.5 4081.5,2646.5 4100,2665 4275,2665 4305,2635 4455,2635 4475,2615 4615,2615 4640,2590 v1(4640,2455)
pads on no net: M1.6 M1.7 M1.8 M1.10 M1.11 U1.2 U1.3 U1.4 U1.24 U1.25 U1.26 U1.27 U1.33 U1.34 U1.35 U1.36 U1.37 U1.44 U1.45 U1.50 U1.51 U1.52 U1.53 U1.54 U1.55 U1.56 U1.57 U1.58 U1.59 U1.61 U1.62 U9.9 U9.10 U9.11 U9.12 U9.15 USB_232.11 USB_232.12
copper on no net:
  other v1: 4600,2900 4595,2970 4000,3130

## Polygon pours and split planes (outlines as drawn)
GND on Top Layer "Bottom Layer-No Net" (solid, remove dead copper): 2855,3325 2835,3305 2835,3295 2835,3270 2835,2895 2835,2365 2890,2310 2985,2310 3675,2310 3895,2310 4260,2310 4265,2305 4555,2305 4630,2305 4875,2305 4900,2305 4955,2360 4960,2365 4960,2370 4960,2660 4960,3030 4960,3280 4920,3320 4915,3325 4670,3325 4375,3325 4005,3325 3640,3325 3345,3325 3125,3325 2905,3325 2855,3325
GND on Bottom Layer "Bottom Layer-No Net" (solid, remove dead copper): 2855,3325 2855,3320 2835,3300 2835,3260 2835,2940 2835,2350 2865,2320 2880,2305 3520,2305 3670,2305 4215,2305 4570,2305 4750,2305 4900,2305 4960,2365 4960,2540 4960,2895 4960,3165 4960,3290 4925,3325 4890,3325 4180,3325 3645,3325 3200,3325 2855,3325

## Keep-outs
Keep-Out Layer:
  lines w10: 2825,2320 ccw(c2847.5,2317.5) 2845,2295 4950,2295 ccw(c4950,2315) 4970,2315 4970,3315 ccw(c4952.5,3317.5) 4950,3335 2845,3335 ccw(c2845,3315) 2825,3315 2825,2320